# Altium PCB Testpoints.PcbDoc
Units mil, origin at the board's own origin, x right, y up, seen from the top; angles counter-clockwise.
Board outline 2500 x 1500 mil, 2 copper layers (Top Layer, Bottom Layer); 15 components, 26 nets, 58 pads, 4 vias.
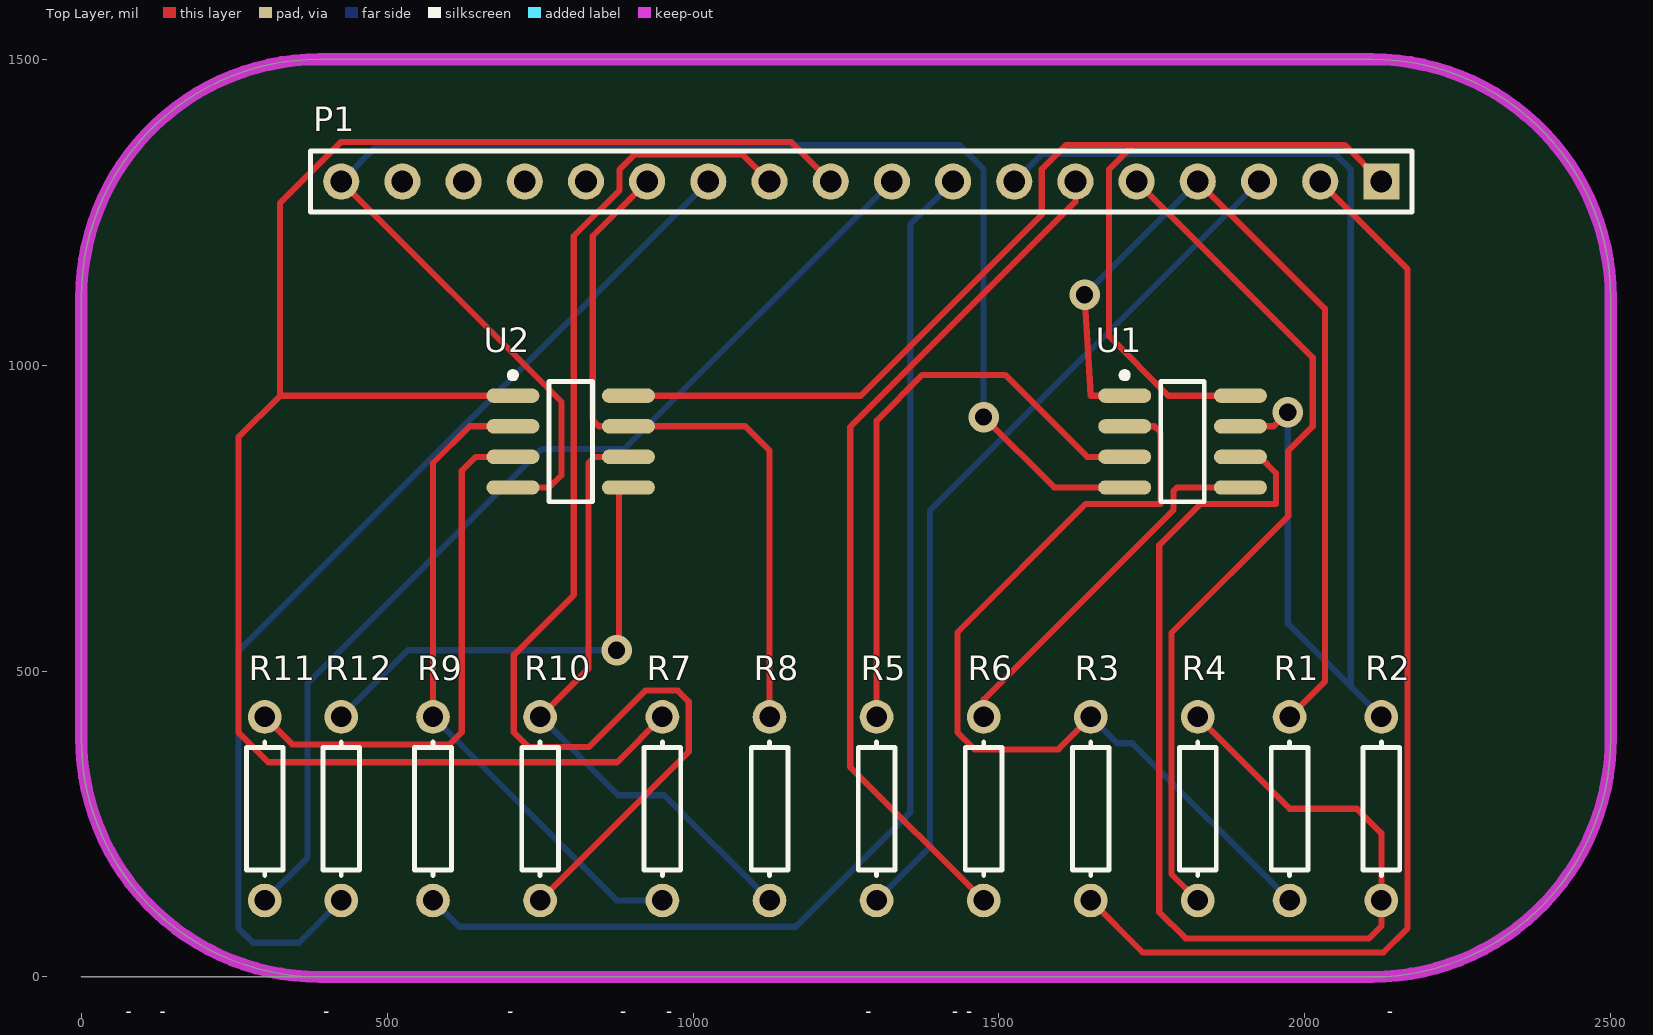
[diagram p0: Top Layer view]
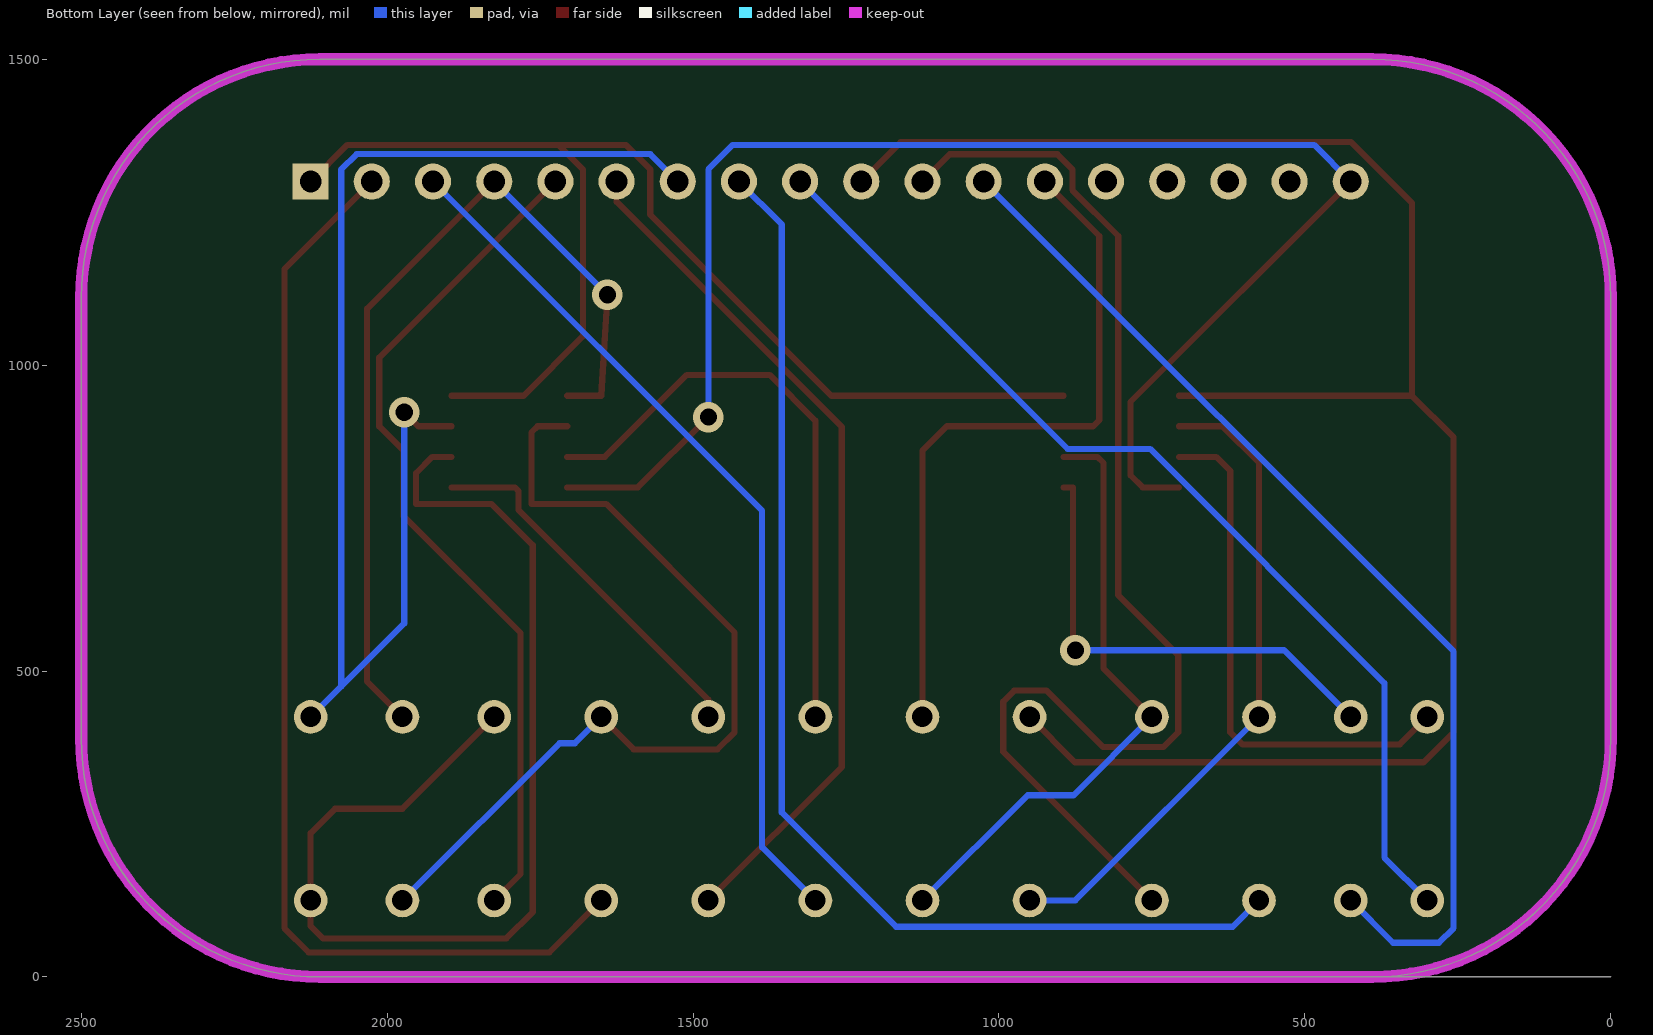
[diagram p1: Bottom Layer view, seen from below]

## Layer stack, top to bottom
Top Solder: solder mask 0.4, Solder Resist, Dk 3.5
Top Layer: signal copper 1.4
Dielectric 1: dielectric 12.6, FR-4, Dk 4.8
Bottom Layer: signal copper 1.4
Bottom Solder: solder mask 0.4, Solder Resist, Dk 3.5

## Board outline
0,0 2000,0 2110,0 ccw(c2110,390) 2500,390 2500,500 2500,1000 2500,1110 ccw(c2110,1110) 2110,1500 2000,1500 500,1500 390,1500 ccw(c390,1110) 0,1110 0,1000 0,390 ccw(c390,390) 390,0 500,0

## Design rules (kind name [scope] priority, off if disabled: settings)
AssemblyTestPointUsage [All] p1: allowmultiple=TRUE
AssemblyTestpoint [(IsVia)] p1: testpointundercomponent=FALSE minsize=40 maxsize=60 preferedsize=55 minholesize=20 maxholesize=40 preferedholesize=35 testpointgrid=1 usegrid=TRUE gridoriginx=1075 gridoriginy=2800 gridtolerance=0.01 allowsidebottom=TRUE
Clearance [All] p1: gap=10 ignorepadtopadclearanceinfootprint=FALSE except(0: Arc-Hole Track-Hole SMDPad-Hole THPad-Hole Via-Hole Fill-Hole Poly-Hole Region-Hole Text-Hole)
FabricationTestPointUsage [All] p1: valid=0 allowmultiple=TRUE
FabricationTestpoint [(IsPad And OnMultiLayer)] p1: side=2 testpointundercomponent=TRUE minsize=40 maxsize=60 preferedsize=55 minholesize=20 maxholesize=40 preferedholesize=35 testpointgrid=1 allowsidebottom=TRUE usegrid=TRUE gridoriginx=1075 gridoriginy=2800 gridtolerance=0.01
MinimumSolderMaskSliver [All] p1: minsoldermaskwidth=4
PolygonConnect [All] p1: connectstyle=Direct reliefconductorwidth=10 reliefentries=4 polygonreliefangle="90 Angle" airgapwidth=10
RoutingVias [All] p1: holewidth=28 width=50 viastyle="Through Hole" minholewidth=28 minwidth=50 maxholewidth=28 maxwidth=50
SilkToSilkClearance [All] p1: silktosilkclearance=4
SilkToSolderMaskClearance [IsPad] p1: minsilkscreentomaskgap=4 clearancetoexposedcopper=TRUE
SolderMaskExpansion [All] p1: expansion=4 istentingtop=FALSE
Width [All] p1: maxlimit=10 minlimit=10 preferedwidth=10
23 further rules are at their usual default settings.

## Components (designator, comment, footprint, x,y, rotation, side; value= is the part's Value field where it differs from the comment)
P1 "Header 18" HDR1X18 2125,1300 r180 top locked
R1 "Res1" AXIAL-0.3 1975,275 r90 top locked
R2 "Res1" AXIAL-0.3 2125,275 r90 top locked
R3 "Res1" AXIAL-0.3 1650,275 r90 top locked
R4 "Res1" AXIAL-0.3 1825,275 r90 top locked
R5 "Res1" AXIAL-0.3 1300,275 r90 top locked
R6 "Res1" AXIAL-0.3 1475,275 r90 top locked
R7 "Res1" AXIAL-0.3 950,275 r90 top locked
R8 "Res1" AXIAL-0.3 1125,275 r90 top locked
R9 "Res1" AXIAL-0.3 575,275 r90 top locked
R10 "Res1" AXIAL-0.3 750,275 r90 top locked
R11 "Res1" AXIAL-0.3 300,275 r90 top locked
R12 "Res1" AXIAL-0.3 425,275 r90 top locked
U1 "LT1112S8" S8_N 1800,875 r0 top
U2 "LT1112S8" S8_N 800,875 r0 top

## Footprints (in the part's own frame and the unit in brackets; to place one, negate y for a bottom-side part, rotate by r counter-clockwise, add the part's x,y. Pads: shape width x height; smd on the part's side, far side on the other; paste and mask are expansions set on the pad)
AXIAL-0.3 [mm] "Axial Device, Thru-Hole; 2 Leads; 0.3 in Pin Spacing"
  round 1.4 hole 0.85: 1(-3.81,0) 2(3.81,0)
  silkscreen extent -2.77,-0.76 2.77,0.76
HDR1X18 [mm] "Connector; Header; 18 Position"
  rect 1.5x1.5 hole 0.9: 1(0,0)
  round 1.5 hole 0.9: 2(2.54,0) 3(5.08,0) 4(7.62,0) 5(10.16,0) 6(12.7,0) 7(15.24,0) 8(17.78,0) 9(20.32,0) 10(22.86,0) 11(25.4,0) 12(27.94,0) 13(30.48,0) 14(33.02,0) 15(35.56,0) 16(38.1,0) 17(40.64,0) 18(43.18,0)
  silkscreen extent -1.27,-1.27 44.45,1.27
S8_N [mm] "SOIC, 8-Leads, Body 4.9x3.9mm, Pitch 1.27mm, IPC Medium Density"
  oval 2.2x0.6 smd: 1(-2.4,1.905) 2(-2.4,0.635) 3(-2.4,-0.635) 4(-2.4,-1.905) 5(2.4,-1.905) 6(2.4,-0.635) 7(2.4,0.635) 8(2.4,1.905)
  silkscreen extent -2.52,-2.5 0.9,2.88, body extent -2,-2.5 2,2.5, height 1.76

## Part data
P1: "Header, 18-Pin"
R1 R2 R3 R4 R5 R6 R7 R8 R9 R10 R11 R12: "Resistor"
U1 U2: "Dual Low Power Precision, Picoamp Input Operational Amplifier"

## Via types
v1: diameter 50, hole 28, Top Layer to Bottom Layer, 4 vias

## Nets (pads, with @x,y where several pads share a name; then routed paths per layer and width w, separated by ;. In a path a pad name is that pad's centre, name@x,y a point inside that pad or via, vN(x,y) a via of type N, cw(c..) or ccw(c..) an arc to the next point about the centre after c; other vN are vias at no path point)
GND: P1.18 U1.4 U2.4 | length 2491.5
  Top Layer w10: P1.18 785,940 785,820 765,800 U2.4 ; v1(1475,915) 1590,800 U1.4
  Bottom Layer w10: P1.18 485,1360 1435,1360 1475,1320 v1(1475,915)
NET1: P1.2 R3.1 | length 1849
  Top Layer w10: R3.1 1735,40 2128,40 2168,80 2168,1157 P1.2
NET2: P1.3 R5.1 | length 1433.9
  Bottom Layer w10: R5.1 1387,212 1387,762 P1.3
NET3: P1.4 R1.2 U1.1 | length 1467.5
  Top Layer w10: v1(1640,1115) 1650,950 U1.1 ; P1.4 2032.8,1092.2 2032.8,482.8 R1.2
  Bottom Layer w10: v1(1640,1115) P1.4
NET4: P1.5 R4.1 | length 1407.6
  Top Layer w10: P1.5 2012.8,1012.2 2012.8,899.81 1972.8,859.81 1972.8,752.99 1782,562.2 1782,168 R4.1
NET5: P1.6 R6.1 | length 1417.7
  Top Layer w10: R6.1 1257,343 1257,899 1625,1267 P1.6
NET6: P1.7 R2.2 U1.7 | length 2072.4
  Top Layer w10: U1.7 1949,900 v1(1972,923)
  Bottom Layer w10: P1.7 1570,1345 2050,1345 2075,1320 2075,475 ; v1(1972,923) 1972,578 2075,475 ; R2.2 2075,475
NET7: P1.8 R9.1 | length 1935.3
  Bottom Layer w10: R9.1 618,82 1168,82 1355,269 1355,1230 P1.8
NET8: P1.9 R11.1 | length 1678.7
  Bottom Layer w10: R11.1 370,195 370,480 753,863 888,863 P1.9
NET9: P1.10 R7.2 U2.1 | length 2985.6
  Top Layer w10: U2.1 325,950 ; R7.2 876,351 306,351 257,400 257,882 325,950 ; P1.10 1160.47,1364.53 424.53,1364.53 325,1265 325,950
NET10: P1.11 R10.1 | length 2032.4
  Top Layer w10: R10.1 993,368 993,450 975,468 922,468 830,376 731,376 707,400 707,526 805,624 805,1211 880,1286 880,1320 904.53,1344.53 1080.47,1344.53 P1.11
NET11: P1.12 R12.1 | length 1744.6
  Bottom Layer w10: R12.1 356,56 281,56 257,80 257,532 P1.12
NET12: P1.13 R8.2 U2.7 | length 1171.6
  Top Layer w10: P1.13 836,1211 836,910 846,900 U2.7 1085,900 1125,860 R8.2
NET13: P1.14
NET14: P1.15
NET15: P1.16
NET16: P1.17
NetR1_1: R1.1 R3.2 U1.2 | length 1462.3
  Top Layer w10: R3.2 1597,372 1460,372 1432,400 1432,563 1642.19,773.19 1764,773.19 1764,890 1754,900 U1.2
  Bottom Layer w10: R3.2 1693,382 1718,382 R1.1
NetR2_1: R2.1 R4.2 U1.6 | length 1857.7
  Top Layer w10: R4.2 1975,275 2085,275 2125,235 R2.1 2125,83 2105,63 1805,63 1762,106 1762,705.78 1829.41,773.19 1952.8,773.19 1952.8,823.2 1926,850 U1.6
NetR5_2: R5.2 U1.3 | length 976.1
  Top Layer w10: R5.2 1300,909 1375,984 1510,984 1644,850 U1.3
NetR6_2: R6.2 U1.5 | length 609.4
  Top Layer w10: R6.2 1475,453.19 1785.34,763.53 1785.34,794.34 1791,800 U1.5
NetR7_1: R7.1 R9.2 U2.2 | length 1069.6
  Top Layer w10: R9.2 575,840 635,900 U2.2
  Bottom Layer w10: R9.2 875,125 R7.1
NetR8_1: R8.1 R10.2 U2.6 | length 1016.6
  Top Layer w10: R10.2 829,504 829,840 839,850 U2.6
  Bottom Layer w10: R10.2 878,297 953,297 R8.1
NetR11_2: R11.2 U2.3 | length 869
  Top Layer w10: R11.2 345,380 602,380 622,400 622,827 645,850 U2.3
NetR12_2: R12.2 U2.5 | length 778.3
  Top Layer w10: v1(875,534) 879,538 879,800 U2.5
  Bottom Layer w10: R12.2 534,534 v1(875,534)
VCC: P1.1 U1.8 U2.8 | length 2052.8
  Top Layer w10: U2.8 1274,950 1570,1246 1570,1320 1610,1360 1720,1360 ; U1.8 1777,950 1680,1047 1680,1320 1720,1360 ; P1.1 2065,1360 1720,1360

## Keep-outs
Keep-Out Layer:
  lines w20: 0,390 ccw(c390,390) 390,0 500,0 700,0 2000,0 2110,0 ccw(c2110,390) 2500,390 2500,500 2500,1000 2500,1110 ccw(c2110,1110) 2110,1500 2000,1500 500,1500 390,1500 ccw(c390,1110) 0,1110 0,1000 0,390

## Silkscreen, mask and mechanical layers (free items; w line width, h text height)
Top Overlay:
  text "Altium Advanced Training: '.Pcb_File_Name_No_Path'" at 10,-120.01 h60